# Altium PCB RFID2.PcbDoc (part 2 of 3)
Units mil, origin at the board's own origin, x right, y up, seen from the top; angles counter-clockwise.
Board outline 2824.02 x 3937.01 mil, 2 copper layers (Top Layer, Bottom Layer); 76 components, 32 nets, 236 pads, 16 vias.
Unrouted connection lines stored in the file: 34.
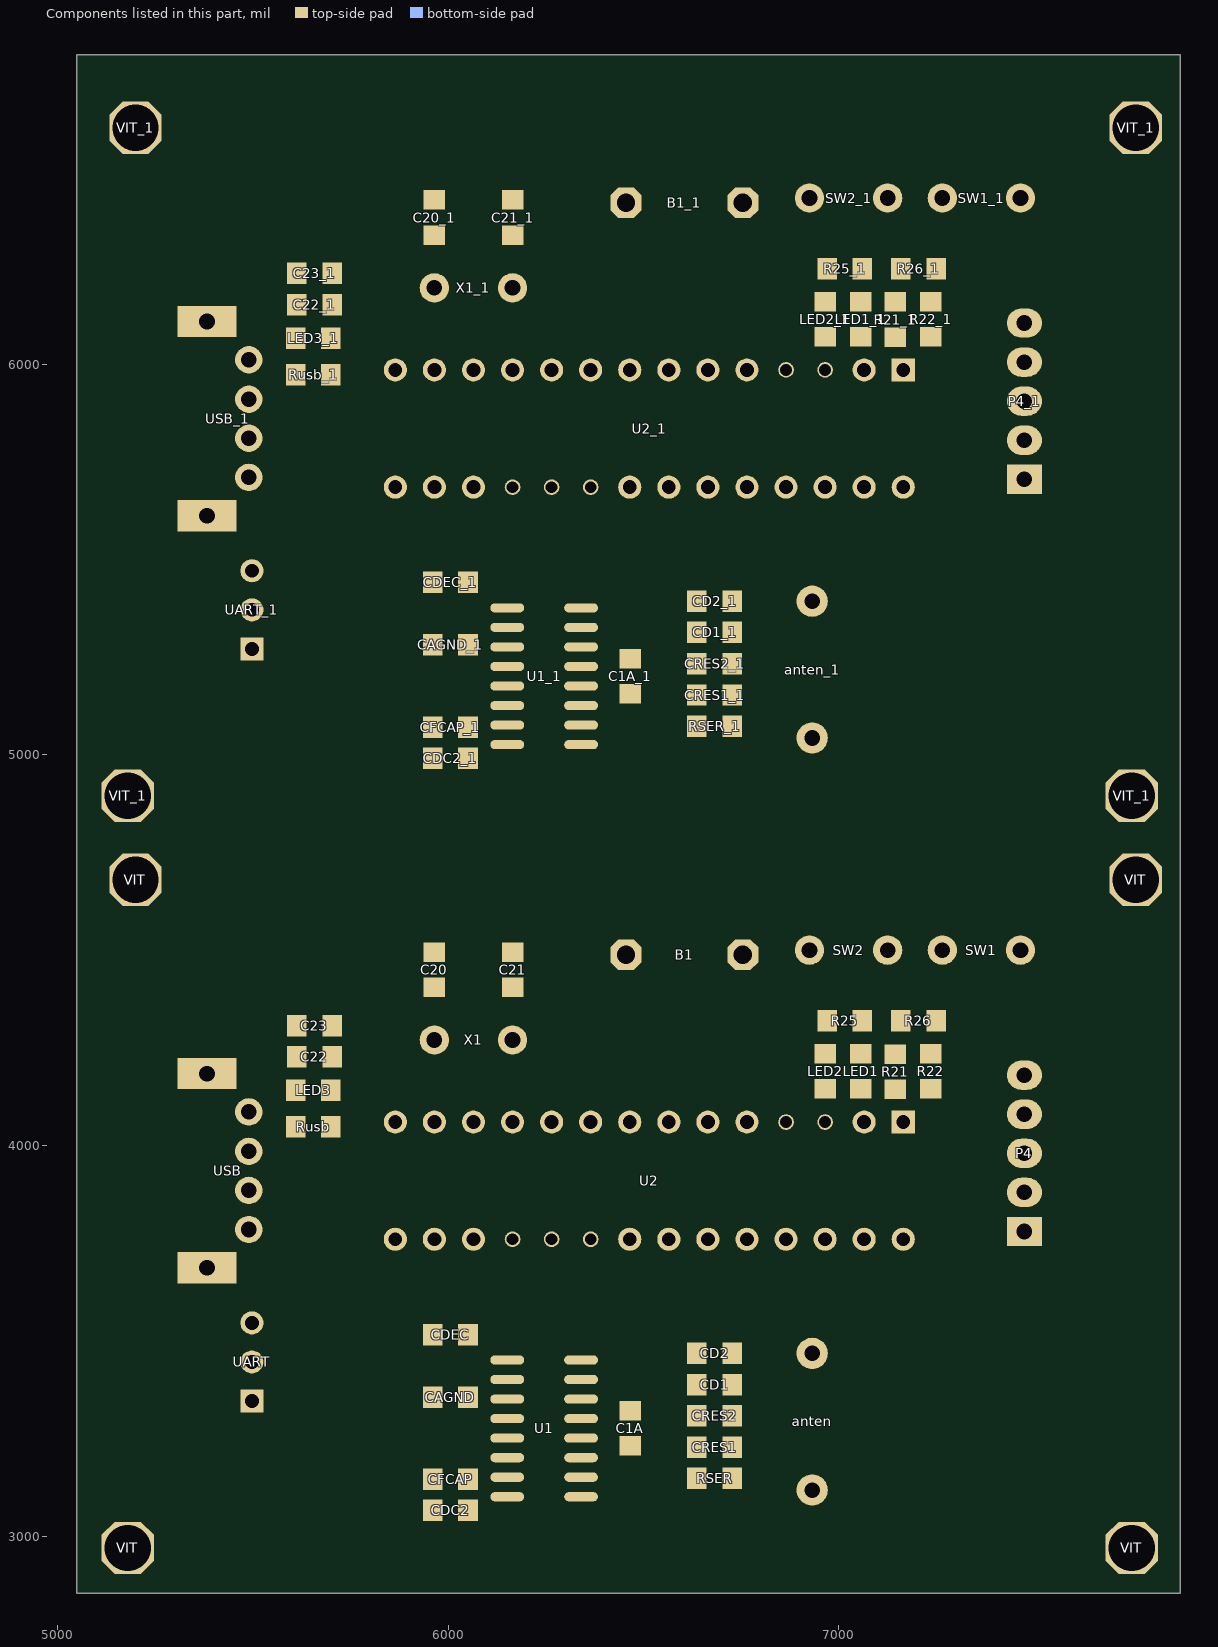
[diagram p2: the components of this part, seen from the top]

## Via types
v1: diameter 50, hole 30, Top Layer to Bottom Layer, 16 vias

## Nets (pads, with @x,y where several pads share a name; then routed paths per layer and width w, separated by ;. In a path a pad name is that pad's centre, name@x,y a point inside that pad or via, vN(x,y) a via of type N, cw(c..) or ccw(c..) an arc to the next point about the centre after c; other vN are vias at no path point) (continued)
copper on no net: (continued)
  Top Layer w1: 7369.88,5161.24 7372.88,5161.24 ; 7369.88,5162.24 7372.88,5162.24 ; 7369.88,5163.24 7372.88,5163.24 ; 7369.88,5164.24 7372.88,5164.24 ; 7369.88,5165.24 7372.88,5165.24 ; 7369.88,5166.24 7372.88,5166.24 ; 7369.88,5167.24 7372.88,5167.24 ; 7369.88,5168.24 7372.88,5168.24 ; 7369.88,5169.24 7372.88,5169.24 ; 7369.88,5170.24 7372.88,5170.24 ; 7369.88,5171.24 7372.88,5171.24 ; 7369.88,5172.24 7372.88,5172.24 ; 7369.88,5173.24 7372.88,5173.24 ; 7369.88,5174.24 7372.88,5174.24 ; 7369.88,5175.24 7372.88,5175.24 ; 7369.88,5176.24 7372.88,5176.24 ; 7369.88,5177.24 7372.88,5177.24 ; 7369.88,5178.24 7372.88,5178.24 ; 7369.88,5179.24 7372.88,5179.24 ; 7369.88,5180.24 7372.88,5180.24 ; 7369.88,5181.24 7372.88,5181.24 ; 7369.88,5182.24 7372.88,5182.24 ; 7369.88,5183.24 7372.88,5183.24 ; 7369.88,5184.24 7372.88,5184.24 ; 7369.88,5185.24 7372.88,5185.24 ; 7369.88,5186.24 7372.88,5186.24 ; 7369.88,5187.24 7372.88,5187.24 ; 7369.88,5188.24 7372.88,5188.24 ; 7369.88,5189.24 7372.88,5189.24 ; 7369.88,5190.24 7372.88,5190.24 ; 7369.88,5191.24 7372.88,5191.24 ; 7369.88,5192.24 7372.88,5192.24 ; 7369.88,5193.24 7372.88,5193.24 ; 7369.88,5194.24 7372.88,5194.24 ; 7369.88,5195.24 7372.88,5195.24 ; 7369.88,5196.24 7372.88,5196.24 ; 7369.88,5197.24 7372.88,5197.24 ; 7369.88,5198.24 7372.88,5198.24 ; 7369.88,5199.24 7372.88,5199.24 ; 7369.88,5200.24 7372.88,5200.24 ; 7369.88,5201.24 7372.88,5201.24 ; 7369.88,5202.24 7372.88,5202.24 ; 7369.88,5203.24 7372.88,5203.24 ; 7369.88,5204.24 7372.88,5204.24 ; 7369.88,5205.24 7372.88,5205.24 ; 7369.88,5206.24 7372.88,5206.24 ; 7369.88,5207.24 7372.88,5207.24 ; 7369.88,5208.24 7372.88,5208.24 ; 7369.88,5209.24 7372.88,5209.24 ; 7369.88,5210.24 7372.88,5210.24 ; 7369.88,5211.24 7372.88,5211.24 ; 7369.88,5212.24 7372.88,5212.24 ; 7369.88,5213.24 7372.88,5213.24 ; 7369.88,5214.24 7372.88,5214.24 ; 7369.88,5215.24 7372.88,5215.24 ; 7369.88,5216.24 7372.88,5216.24 ; 7369.88,5217.24 7372.88,5217.24 ; 7369.88,5218.24 7372.88,5218.24 ; 7369.88,5219.24 7372.88,5219.24 ; 7369.88,5220.24 7372.88,5220.24 ; 7369.88,5221.24 7372.88,5221.24 ; 7369.88,5222.24 7372.88,5222.24 ; 7369.88,5223.24 7372.88,5223.24 ; 7369.88,5224.24 7372.88,5224.24 ; 7369.88,5225.24 7372.88,5225.24 ; 7369.88,5226.24 7372.88,5226.24 ; 7369.88,5227.24 7372.88,5227.24 ; 7369.88,5228.24 7372.88,5228.24 ; 7369.88,5229.24 7372.88,5229.24 ; 7369.88,5230.24 7372.88,5230.24 ; 7369.88,5231.24 7372.88,5231.24 ; 7369.88,5232.24 7372.88,5232.24 ; 7369.88,5233.24 7372.88,5233.24 ; 7369.88,5234.24 7372.88,5234.24 ; 7369.88,5235.24 7372.88,5235.24 ; 7369.88,5236.24 7372.88,5236.24 ; 7369.88,5237.24 7372.88,5237.24 ; 7369.88,5238.24 7372.88,5238.24 ; 7369.88,5239.24 7372.88,5239.24 ; 7369.88,5240.24 7372.88,5240.24 ; 7369.88,5241.24 7372.88,5241.24 ; 7369.88,5242.24 7372.88,5242.24 ; 7369.88,5243.24 7372.88,5243.24 ; 7369.88,5244.24 7372.88,5244.24 ; 7369.88,5245.24 7372.88,5245.24 ; 7369.88,5246.24 7372.88,5246.24 ; 7369.88,5247.24 7372.88,5247.24 ; 7369.88,5248.24 7372.88,5248.24 ; 7369.88,5249.24 7372.88,5249.24 ; 7369.88,5250.24 7372.88,5250.24 ; 7369.88,5251.24 7372.88,5251.24 ; 7369.88,5252.24 7372.88,5252.24 ; 7369.88,5253.24 7372.88,5253.24 ; 7369.88,5254.24 7372.88,5254.24 ; 7369.88,5255.24 7372.88,5255.24 ; 7369.88,5256.24 7372.88,5256.24 ; 7369.88,5257.24 7372.88,5257.24 ; 7369.88,5258.24 7372.88,5258.24 ; 7369.88,5259.24 7372.88,5259.24 ; 7369.88,5260.24 7372.88,5260.24 ; 7369.88,5261.24 7372.88,5261.24 ; 7369.88,5262.24 7372.88,5262.24 ; 7369.88,5263.24 7372.88,5263.24 ; 7369.88,5264.24 7372.88,5264.24 ; 7369.88,5265.24 7372.88,5265.24 ; 7369.88,5266.24 7372.88,5266.24 ; 7369.88,5267.24 7372.88,5267.24 ; 7369.88,5268.24 7372.88,5268.24 ; 7369.88,5269.24 7372.88,5269.24 ; 7369.88,5270.24 7372.88,5270.24 ; 7369.88,5271.24 7372.88,5271.24 ; 7369.88,5272.24 7372.88,5272.24 ; 7369.88,5273.24 7372.88,5273.24 ; 7369.88,5274.24 7372.88,5274.24 ; 7369.88,5275.24 7372.88,5275.24 ; 7369.88,5276.24 7372.88,5276.24 ; 7369.88,5277.24 7372.88,5277.24 ; 7369.88,5278.24 7372.88,5278.24 ; 7369.88,5279.24 7372.88,5279.24 ; 7369.88,5280.24 7372.88,5280.24 ; 7369.88,5281.24 7372.88,5281.24 ; 7369.88,5282.24 7372.88,5282.24 ; 7369.88,5283.24 7372.88,5283.24 ; 7369.88,5284.24 7372.88,5284.24 ; 7369.88,5285.24 7372.88,5285.24 ; 7369.88,5286.24 7372.88,5286.24 ; 7369.88,5287.24 7372.88,5287.24 ; 7369.88,5288.24 7372.88,5288.24 ; 7369.88,5289.24 7372.88,5289.24 ; 7369.88,5290.24 7372.88,5290.24 ; 7369.88,5291.24 7372.88,5291.24 ; 7369.88,5292.24 7372.88,5292.24 ; 7369.88,5293.24 7372.88,5293.24 ; 7369.88,5294.24 7372.88,5294.24 ; 7369.88,5295.24 7372.88,5295.24 ; 7369.88,5296.24 7372.88,5296.24 ; 7369.88,5297.24 7372.88,5297.24 ; 7369.88,5298.24 7372.88,5298.24 ; 7369.88,5299.24 7372.88,5299.24 ; 7369.88,5300.24 7372.88,5300.24 ; 7369.88,5301.24 7372.88,5301.24 ; 7369.88,5302.24 7372.88,5302.24 ; 7369.88,5303.24 7372.88,5303.24 ; 7369.88,5304.24 7372.88,5304.24 ; 7369.88,5305.24 7372.88,5305.24 ; 7369.88,5306.24 7372.88,5306.24 ; 7369.88,5307.24 7373.88,5307.24 ; 7370.88,5157.24 7374.88,5157.24 ; 7370.88,5158.24 7373.88,5158.24 ; 7370.88,5159.24 7373.88,5159.24 ; 7370.88,5160.24 7373.88,5160.24 ; 7370.88,5308.24 7373.88,5308.24 ; 7370.88,5309.24 7373.88,5309.24 ; 7370.88,5310.24 7374.88,5310.24 ; 7371.88,5155.24 7374.88,5155.24 ; 7371.88,5156.24 7374.88,5156.24 ; 7371.88,5311.24 7374.88,5311.24 ; 7371.88,5312.24 7374.88,5312.24 ; 7371.88,5313.24 7375.88,5313.24 ; 7372.88,5153.24 7375.88,5153.24 ; 7372.88,5154.24 7375.88,5154.24 ; 7372.88,5314.24 7375.88,5314.24 ; 7372.88,5315.24 7376.88,5315.24 ; 7373.88,5151.24 7377.88,5151.24 ; 7373.88,5152.24 7376.88,5152.24 ; 7373.88,5316.24 7376.88,5316.24 ; 7373.88,5317.24 7377.88,5317.24 ; 7374.88,5149.24 7378.88,5149.24 ; 7374.88,5150.24 7377.88,5150.24 ; 7374.88,5318.24 7378.88,5318.24 ; 7375.88,5148.24 7379.88,5148.24 ; 7375.88,5319.24 7379.88,5319.24 ; 7375.88,5320.24 7379.88,5320.24 ; 7376.88,5146.24 7380.88,5146.24 ; 7376.88,5147.24 7380.88,5147.24 ; 7376.88,5321.24 7380.88,5321.24 ; 7377.88,5145.24 7381.88,5145.24 ; 7377.88,5322.24 7381.88,5322.24 ; 7378.88,5144.24 7383.88,5144.24 ; 7378.88,5323.24 7382.88,5323.24 ; 7379.88,3221.24 7382.88,3221.24 ; 7379.88,3222.24 7382.88,3222.24 ; 7379.88,3223.24 7382.88,3223.24 ; 7379.88,3224.24 7382.88,3224.24 ; 7379.88,3225.24 7382.88,3225.24 ; 7379.88,3226.24 7382.88,3226.24 ; 7379.88,3227.24 7382.88,3227.24 ; 7379.88,3228.24 7382.88,3228.24 ; 7379.88,3229.24 7382.88,3229.24 ; 7379.88,3230.24 7382.88,3230.24 ; 7379.88,3231.24 7382.88,3231.24 ; 7379.88,3232.24 7382.88,3232.24 ; 7379.88,3233.24 7382.88,3233.24 ; 7379.88,3234.24 7382.88,3234.24 ; 7379.88,3235.24 7382.88,3235.24 ; 7379.88,3236.24 7382.88,3236.24 ; 7379.88,3237.24 7382.88,3237.24 ; 7379.88,3238.24 7382.88,3238.24 ; 7379.88,3239.24 7382.88,3239.24 ; 7379.88,3240.24 7382.88,3240.24 ; 7379.88,3241.24 7382.88,3241.24 ; 7379.88,3242.24 7382.88,3242.24 ; 7379.88,3243.24 7382.88,3243.24 ; 7379.88,3244.24 7382.88,3244.24 ; 7379.88,3245.24 7382.88,3245.24 ; 7379.88,3246.24 7382.88,3246.24 ; 7379.88,3247.24 7382.88,3247.24 ; 7379.88,3248.24 7382.88,3248.24 ; 7379.88,3249.24 7382.88,3249.24 ; 7379.88,3250.24 7382.88,3250.24 ; 7379.88,3251.24 7382.88,3251.24 ; 7379.88,3252.24 7382.88,3252.24 ; 7379.88,3253.24 7382.88,3253.24 ; 7379.88,3254.24 7382.88,3254.24 ; 7379.88,3255.24 7382.88,3255.24 ; 7379.88,3256.24 7382.88,3256.24 ; 7379.88,3257.24 7382.88,3257.24 ; 7379.88,3258.24 7382.88,3258.24 ; 7379.88,3259.24 7382.88,3259.24 ; 7379.88,3260.24 7382.88,3260.24 ; 7379.88,3261.24 7382.88,3261.24 ; 7379.88,3262.24 7382.88,3262.24 ; 7379.88,3263.24 7382.88,3263.24 ; 7379.88,3264.24 7382.88,3264.24 ; 7379.88,3265.24 7382.88,3265.24 ; 7379.88,3266.24 7382.88,3266.24 ; 7379.88,3267.24 7382.88,3267.24 ; 7379.88,3268.24 7382.88,3268.24 ; 7379.88,3269.24 7382.88,3269.24 ; 7379.88,3270.24 7382.88,3270.24 ; 7379.88,3271.24 7382.88,3271.24 ; 7379.88,3272.24 7382.88,3272.24 ; 7379.88,3273.24 7382.88,3273.24 ; 7379.88,3274.24 7382.88,3274.24 ; 7379.88,3275.24 7382.88,3275.24 ; 7379.88,3276.24 7382.88,3276.24 ; 7379.88,3277.24 7382.88,3277.24 ; 7379.88,3278.24 7382.88,3278.24 ; 7379.88,3279.24 7382.88,3279.24 ; 7379.88,3280.24 7382.88,3280.24 ; 7379.88,3281.24 7382.88,3281.24 ; 7379.88,3282.24 7382.88,3282.24 ; 7379.88,3283.24 7382.88,3283.24 ; 7379.88,3284.24 7382.88,3284.24 ; 7379.88,3285.24 7382.88,3285.24 ; 7379.88,3286.24 7382.88,3286.24 ; 7379.88,3287.24 7382.88,3287.24 ; 7379.88,3288.24 7382.88,3288.24 ; 7379.88,3289.24 7382.88,3289.24 ; 7379.88,3290.24 7382.88,3290.24 ; 7379.88,3291.24 7382.88,3291.24 ; 7379.88,3292.24 7382.88,3292.24 ; 7379.88,3293.24 7382.88,3293.24 ; 7379.88,3294.24 7382.88,3294.24 ; 7379.88,3295.24 7382.88,3295.24 ; 7379.88,3296.24 7382.88,3296.24 ; 7379.88,3297.24 7382.88,3297.24 ; 7379.88,3298.24 7382.88,3298.24 ; 7379.88,3299.24 7382.88,3299.24 ; 7379.88,3300.24 7382.88,3300.24 ; 7379.88,3301.24 7382.88,3301.24 ; 7379.88,3302.24 7382.88,3302.24 ; 7379.88,3303.24 7382.88,3303.24 ; 7379.88,3304.24 7382.88,3304.24 ; 7379.88,3305.24 7382.88,3305.24 ; 7379.88,3306.24 7382.88,3306.24 ; 7379.88,3307.24 7382.88,3307.24 ; 7379.88,3308.24 7382.88,3308.24 ; 7379.88,3309.24 7382.88,3309.24 ; 7379.88,3310.24 7382.88,3310.24 ; 7379.88,3311.24 7382.88,3311.24 ; 7379.88,3312.24 7382.88,3312.24 ; 7379.88,3313.24 7382.88,3313.24 ; 7379.88,3314.24 7382.88,3314.24 ; 7379.88,3315.24 7382.88,3315.24 ; 7379.88,3316.24 7382.88,3316.24 ; 7379.88,3317.24 7382.88,3317.24 ; 7379.88,3318.24 7382.88,3318.24 ; 7379.88,3319.24 7382.88,3319.24 ; 7379.88,3320.24 7382.88,3320.24 ; 7379.88,3321.24 7382.88,3321.24 ; 7379.88,3322.24 7382.88,3322.24 ; 7379.88,3323.24 7382.88,3323.24 ; 7379.88,3324.24 7382.88,3324.24 ; 7379.88,3325.24 7382.88,3325.24 ; 7379.88,3326.24 7382.88,3326.24 ; 7379.88,3327.24 7382.88,3327.24 ; 7379.88,3328.24 7382.88,3328.24 ; 7379.88,3329.24 7382.88,3329.24 ; 7379.88,3330.24 7382.88,3330.24 ; 7379.88,3331.24 7382.88,3331.24 ; 7379.88,3332.24 7382.88,3332.24 ; 7379.88,3333.24 7382.88,3333.24 ; 7379.88,3334.24 7382.88,3334.24 ; 7379.88,3335.24 7382.88,3335.24 ; 7379.88,3336.24 7382.88,3336.24 ; 7379.88,3337.24 7382.88,3337.24 ; 7379.88,3338.24 7382.88,3338.24 ; 7379.88,3339.24 7382.88,3339.24 ; 7379.88,3340.24 7382.88,3340.24 ; 7379.88,3341.24 7382.88,3341.24 ; 7379.88,3342.24 7382.88,3342.24 ; 7379.88,3343.24 7382.88,3343.24 ; 7379.88,3344.24 7382.88,3344.24 ; 7379.88,3345.24 7382.88,3345.24 ; 7379.88,3346.24 7382.88,3346.24 ; 7379.88,3347.24 7382.88,3347.24 ; 7379.88,3348.24 7382.88,3348.24 ; 7379.88,3349.24 7382.88,3349.24 ; 7379.88,3350.24 7382.88,3350.24 ; 7379.88,3351.24 7382.88,3351.24 ; 7379.88,3352.24 7382.88,3352.24 ; 7379.88,3353.24 7382.88,3353.24 ; 7379.88,3354.24 7382.88,3354.24 ; 7379.88,3355.24 7382.88,3355.24 ; 7379.88,3356.24 7382.88,3356.24 ; 7379.88,3357.24 7382.88,3357.24 ; 7379.88,3358.24 7382.88,3358.24 ; 7379.88,3359.24 7382.88,3359.24 ; 7379.88,3360.24 7382.88,3360.24 ; 7379.88,3361.24 7382.88,3361.24 ; 7379.88,3362.24 7382.88,3362.24 ; 7379.88,3363.24 7382.88,3363.24 ; 7379.88,3364.24 7382.88,3364.24 ; 7379.88,3365.24 7382.88,3365.24 ; 7379.88,3366.24 7382.88,3366.24 ; 7379.88,3367.24 7383.88,3367.24 ; 7379.88,5143.24 7384.88,5143.24 ; 7379.88,5324.24 7384.88,5324.24 ; 7380.88,3217.24 7384.88,3217.24 ; 7380.88,3218.24 7383.88,3218.24 ; 7380.88,3219.24 7383.88,3219.24 ; 7380.88,3220.24 7383.88,3220.24 ; 7380.88,3368.24 7383.88,3368.24 ; 7380.88,3369.24 7383.88,3369.24 ; 7380.88,3370.24 7384.88,3370.24 ; 7380.88,5142.24 7385.88,5142.24 ; 7380.88,5325.24 7385.88,5325.24 ; 7381.88,3215.24 7384.88,3215.24 ; 7381.88,3216.24 7384.88,3216.24 ; 7381.88,3371.24 7384.88,3371.24 ; 7381.88,3372.24 7384.88,3372.24 ; 7381.88,3373.24 7385.88,3373.24 ; 7381.88,5326.24 7386.88,5326.24 ; 7382.88,3213.24 7385.88,3213.24 ; 7382.88,3214.24 7385.88,3214.24 ; 7382.88,3374.24 7385.88,3374.24 ; 7382.88,3375.24 7386.88,3375.24 ; 7382.88,5141.24 7387.88,5141.24 ; 7382.88,5327.24 7388.88,5327.24 ; 7383.88,3211.24 7387.88,3211.24 ; 7383.88,3212.24 7386.88,3212.24 ; 7383.88,3376.24 7386.88,3376.24 ; 7383.88,3377.24 7387.88,3377.24 ; 7383.88,5140.24 7388.88,5140.24 ; 7384.88,3209.24 7388.88,3209.24 ; 7384.88,3210.24 7387.88,3210.24 ; 7384.88,3378.24 7388.88,3378.24 ; 7384.88,5139.24 7391.88,5139.24 ; 7384.88,5328.24 7390.88,5328.24 ; 7385.88,3208.24 7389.88,3208.24 ; 7385.88,3379.24 7389.88,3379.24 ; 7385.88,3380.24 7389.88,3380.24 ; 7385.88,5329.24 7393.88,5329.24 ; 7386.88,3206.24 7390.88,3206.24 ; 7386.88,3207.24 7390.88,3207.24 ; 7386.88,3381.24 7390.88,3381.24 ; 7386.88,5138.24 7393.88,5138.24 ; 7386.88,5304.24 7408.88,5304.24 ; 7386.88,5305.24 7407.88,5305.24 ; 7386.88,5306.24 7406.88,5306.24 ; 7386.88,5307.24 7406.88,5307.24 ; 7386.88,5308.24 7406.88,5308.24 ; 7386.88,5309.24 7406.88,5309.24 ; 7386.88,5310.24 7405.88,5310.24 ; 7387.88,3205.24 7391.88,3205.24 ; 7387.88,3382.24 7391.88,3382.24 ; 7387.88,5302.24 7410.88,5302.24 ; 7387.88,5303.24 7409.88,5303.24 ; 7387.88,5311.24 7405.88,5311.24 ; 7387.88,5312.24 7404.88,5312.24 ; 7387.88,5330.24 7396.88,5330.24 ; 7388.88,3204.24 7393.88,3204.24 ; 7388.88,3383.24 7392.88,3383.24 ; 7388.88,5137.24 7397.88,5137.24 ; 7388.88,5300.24 7412.88,5300.24 ; 7388.88,5301.24 7411.88,5301.24 ; 7388.88,5313.24 7404.88,5313.24 ; 7389.88,3203.24 7394.88,3203.24 ; 7389.88,3384.24 7394.88,3384.24 ; 7389.88,5154.24 7392.88,5154.24 ; 7389.88,5155.24 7398.88,5155.24 ; 7389.88,5156.24 7404.88,5156.24 ; 7389.88,5157.24 7410.88,5157.24 ; 7389.88,5158.24 7411.88,5158.24 ; 7389.88,5299.24 7413.88,5299.24 ; 7389.88,5314.24 7403.88,5314.24 ; 7389.88,5331.24 7548.88,5331.24 ; 7390.88,3202.24 7395.88,3202.24 ; 7390.88,3385.24 7395.88,3385.24 ; 7390.88,5136.24 7548.88,5136.24 ; 7390.88,5159.24 7412.88,5159.24 ; 7390.88,5160.24 7413.88,5160.24 ; 7390.88,5161.24 7414.88,5161.24 ; 7390.88,5162.24 7415.88,5162.24 ; 7390.88,5163.24 7416.88,5163.24 ; 7390.88,5164.24 7417.88,5164.24 ; 7390.88,5315.24 7401.88,5315.24 ; 7391.88,3386.24 7396.88,3386.24 ; 7391.88,5165.24 7418.88,5165.24 ; 7391.88,5166.24 7419.88,5166.24 ; 7391.88,5167.24 7420.88,5167.24 ; 7391.88,5168.24 7421.88,5168.24 ; 7391.88,5169.24 7422.88,5169.24 ; 7391.88,5170.24 7423.88,5170.24 ; 7391.88,5298.24 7414.88,5298.24 ; 7392.88,3201.24 7397.88,3201.24 ; 7392.88,3387.24 7398.88,3387.24 ; 7392.88,5171.24 7424.88,5171.24 ; 7392.88,5172.24 7425.88,5172.24 ; 7392.88,5173.24 7426.88,5173.24 ; 7392.88,5174.24 7427.88,5174.24 ; 7392.88,5316.24 7399.88,5316.24 ; 7392.88,5332.24 7546.88,5332.24 ; 7393.88,3200.24 7398.88,3200.24 ; 7393.88,5135.24 7545.88,5135.24 ; 7393.88,5175.24 7428.88,5175.24 ; 7393.88,5297.24 7415.88,5297.24 ; 7394.88,3199.24 7401.88,3199.24 ; 7394.88,3388.24 7400.88,3388.24 ; 7394.88,5176.24 7429.88,5176.24 ; 7395.88,3389.24 7403.88,3389.24 ; 7395.88,5177.24 7430.88,5177.24 ; 7395.88,5333.24 7542.88,5333.24 ; 7396.88,3198.24 7403.88,3198.24 ; 7396.88,3364.24 7418.88,3364.24 ; 7396.88,3365.24 7417.88,3365.24 ; 7396.88,3366.24 7416.88,3366.24 ; 7396.88,3367.24 7416.88,3367.24 ; 7396.88,3368.24 7416.88,3368.24 ; 7396.88,3369.24 7416.88,3369.24 ; 7396.88,3370.24 7415.88,3370.24 ; 7396.88,5134.24 7541.88,5134.24 ; 7396.88,5178.24 7431.88,5178.24 ; 7396.88,5248.24 7398.88,5248.24 ; 7397.88,3362.24 7420.88,3362.24 ; 7397.88,3363.24 7419.88,3363.24 ; 7397.88,3371.24 7415.88,3371.24 ; 7397.88,3372.24 7414.88,3372.24 ; 7397.88,3390.24 7406.88,3390.24 ; 7397.88,5179.24 7432.88,5179.24 ; 7397.88,5249.24 7401.88,5249.24 ; 7397.88,5296.24 7416.88,5296.24 ; 7398.88,3197.24 7407.88,3197.24 ; 7398.88,3360.24 7422.88,3360.24 ; 7398.88,3361.24 7421.88,3361.24 ; 7398.88,3373.24 7414.88,3373.24 ; 7398.88,5180.24 7433.88,5180.24 ; 7398.88,5250.24 7404.88,5250.24 ; 7398.88,5295.24 7417.88,5295.24 ; 7399.88,3214.24 7402.88,3214.24 ; 7399.88,3215.24 7408.88,3215.24 ; 7399.88,3216.24 7414.88,3216.24 ; 7399.88,3217.24 7420.88,3217.24 ; 7399.88,3218.24 7421.88,3218.24 ; 7399.88,3359.24 7423.88,3359.24 ; 7399.88,3374.24 7413.88,3374.24 ; 7399.88,3391.24 7558.88,3391.24 ; 7399.88,5181.24 7434.88,5181.24 ; 7399.88,5251.24 7407.88,5251.24 ; 7399.88,5294.24 7418.88,5294.24 ; 7400.88,3196.24 7558.88,3196.24 ; 7400.88,3219.24 7422.88,3219.24 ; 7400.88,3220.24 7423.88,3220.24 ; 7400.88,3221.24 7424.88,3221.24 ; 7400.88,3222.24 7425.88,3222.24 ; 7400.88,3223.24 7426.88,3223.24 ; 7400.88,3224.24 7427.88,3224.24 ; 7400.88,3375.24 7411.88,3375.24 ; 7400.88,5182.24 7435.88,5182.24 ; 7400.88,5252.24 7410.88,5252.24 ; 7400.88,5293.24 7419.88,5293.24 ; 7401.88,3225.24 7428.88,3225.24 ; 7401.88,3226.24 7429.88,3226.24 ; 7401.88,3227.24 7430.88,3227.24 ; 7401.88,3228.24 7431.88,3228.24 ; 7401.88,3229.24 7432.88,3229.24 ; 7401.88,3230.24 7433.88,3230.24 ; 7401.88,3358.24 7424.88,3358.24 ; 7401.88,5183.24 7436.88,5183.24 ; 7401.88,5253.24 7412.88,5253.24 ; 7401.88,5292.24 7420.88,5292.24 ; 7402.88,3231.24 7434.88,3231.24 ; 7402.88,3232.24 7435.88,3232.24 ; 7402.88,3233.24 7436.88,3233.24 ; 7402.88,3234.24 7437.88,3234.24 ; 7402.88,3376.24 7409.88,3376.24 ; 7402.88,3392.24 7556.88,3392.24 ; 7402.88,5184.24 7437.88,5184.24 ; 7402.88,5254.24 7415.88,5254.24 ; 7402.88,5291.24 7421.88,5291.24 ; 7403.88,3195.24 7555.88,3195.24 ; 7403.88,3235.24 7438.88,3235.24 ; 7403.88,3357.24 7425.88,3357.24 ; 7403.88,5185.24 7438.88,5185.24 ; 7403.88,5255.24 7418.88,5255.24 ; 7403.88,5290.24 7422.88,5290.24 ; 7404.88,3236.24 7439.88,3236.24 ; 7404.88,5186.24 7439.88,5186.24 ; 7404.88,5256.24 7419.88,5256.24 ; 7404.88,5289.24 7423.88,5289.24 ; 7405.88,3237.24 7440.88,3237.24 ; 7405.88,3393.24 7552.88,3393.24 ; 7405.88,5187.24 7440.88,5187.24 ; 7405.88,5257.24 7420.88,5257.24 ; 7405.88,5288.24 7424.88,5288.24 ; 7406.88,3194.24 7551.88,3194.24 ; 7406.88,3238.24 7441.88,3238.24 ; 7406.88,3308.24 7408.88,3308.24 ; 7406.88,5188.24 7441.88,5188.24 ; 7406.88,5258.24 7421.88,5258.24 ; 7406.88,5287.24 7425.88,5287.24 ; 7407.88,3239.24 7442.88,3239.24 ; 7407.88,3309.24 7411.88,3309.24 ; 7407.88,3356.24 7426.88,3356.24 ; 7407.88,5189.24 7442.88,5189.24 ; 7407.88,5259.24 7422.88,5259.24 ; 7407.88,5286.24 7426.88,5286.24 ; 7408.88,3240.24 7443.88,3240.24 ; 7408.88,3310.24 7414.88,3310.24 ; 7408.88,3355.24 7427.88,3355.24 ; 7408.88,5190.24 7443.88,5190.24 ; 7408.88,5260.24 7423.88,5260.24 ; 7408.88,5285.24 7427.88,5285.24 ; 7409.88,3241.24 7444.88,3241.24 ; 7409.88,3311.24 7417.88,3311.24 ; 7409.88,3354.24 7428.88,3354.24 ; 7409.88,5191.24 7444.88,5191.24 ; 7409.88,5261.24 7459.88,5261.24 ; 7409.88,5284.24 7428.88,5284.24 ; 7410.88,3242.24 7445.88,3242.24 ; 7410.88,3312.24 7420.88,3312.24 ; 7410.88,3353.24 7429.88,3353.24 ; 7410.88,5192.24 7445.88,5192.24 ; 7410.88,5262.24 7458.88,5262.24 ; 7410.88,5283.24 7429.88,5283.24 ; 7411.88,3243.24 7446.88,3243.24 ; 7411.88,3313.24 7422.88,3313.24 ; 7411.88,3352.24 7430.88,3352.24 ; 7411.88,5193.24 7446.88,5193.24 ; 7411.88,5263.24 7457.88,5263.24 ; 7411.88,5282.24 7445.88,5282.24 ; 7412.88,3244.24 7447.88,3244.24 ; 7412.88,3314.24 7425.88,3314.24 ; 7412.88,3351.24 7431.88,3351.24 ; 7412.88,5194.24 7447.88,5194.24 ; 7412.88,5264.24 7456.88,5264.24 ; 7412.88,5281.24 7444.88,5281.24 ; 7413.88,3245.24 7448.88,3245.24 ; 7413.88,3315.24 7428.88,3315.24 ; 7413.88,3350.24 7432.88,3350.24 ; 7413.88,5195.24 7448.88,5195.24 ; 7413.88,5265.24 7455.88,5265.24 ; 7413.88,5280.24 7443.88,5280.24 ; 7414.88,3246.24 7449.88,3246.24 ; 7414.88,3316.24 7429.88,3316.24 ; 7414.88,3349.24 7433.88,3349.24 ; 7414.88,5196.24 7449.88,5196.24 ; 7414.88,5266.24 7454.88,5266.24 ; 7414.88,5279.24 7442.88,5279.24 ; 7415.88,3247.24 7450.88,3247.24 ; 7415.88,3317.24 7430.88,3317.24 ; 7415.88,3348.24 7434.88,3348.24 ; 7415.88,5197.24 7450.88,5197.24 ; 7415.88,5267.24 7453.88,5267.24 ; 7415.88,5278.24 7442.88,5278.24 ; 7416.88,3248.24 7451.88,3248.24 ; 7416.88,3318.24 7431.88,3318.24 ; 7416.88,3347.24 7435.88,3347.24 ; 7416.88,5198.24 7451.88,5198.24 ; 7416.88,5268.24 7452.88,5268.24 ; 7416.88,5277.24 7443.88,5277.24 ; 7417.88,3249.24 7452.88,3249.24 ; 7417.88,3319.24 7432.88,3319.24 ; 7417.88,3346.24 7436.88,3346.24 ; 7417.88,5199.24 7452.88,5199.24 ; 7417.88,5269.24 7451.88,5269.24 ; 7417.88,5276.24 7444.88,5276.24 ; 7418.88,3250.24 7453.88,3250.24 ; 7418.88,3320.24 7433.88,3320.24 ; 7418.88,3345.24 7437.88,3345.24 ; 7418.88,5200.24 7453.88,5200.24 ; 7418.88,5270.24 7450.88,5270.24 ; 7418.88,5275.24 7445.88,5275.24 ; 7419.88,3251.24 7454.88,3251.24 ; 7419.88,3321.24 7469.88,3321.24 ; 7419.88,3344.24 7438.88,3344.24 ; 7419.88,5201.24 7454.88,5201.24 ; 7419.88,5271.24 7449.88,5271.24 ; 7419.88,5274.24 7446.88,5274.24 ; 7420.88,3252.24 7455.88,3252.24 ; 7420.88,3322.24 7468.88,3322.24 ; 7420.88,3343.24 7439.88,3343.24 ; 7420.88,5202.24 7455.88,5202.24 ; 7420.88,5272.24 7448.88,5272.24 ; 7420.88,5273.24 7447.88,5273.24 ; 7421.88,3253.24 7456.88,3253.24 ; 7421.88,3323.24 7467.88,3323.24 ; 7421.88,3342.24 7455.88,3342.24 ; 7421.88,5203.24 7456.88,5203.24 ; 7422.88,3254.24 7457.88,3254.24 ; 7422.88,3324.24 7466.88,3324.24 ; 7422.88,3341.24 7454.88,3341.24 ; 7422.88,5204.24 7457.88,5204.24 ; 7423.88,3255.24 7458.88,3255.24 ; 7423.88,3325.24 7465.88,3325.24 ; 7423.88,3340.24 7453.88,3340.24 ; 7423.88,5205.24 7458.88,5205.24 ; 7424.88,3256.24 7459.88,3256.24 ; 7424.88,3326.24 7464.88,3326.24 ; 7424.88,3339.24 7452.88,3339.24 ; 7424.88,5206.24 7459.88,5206.24 ; 7425.88,3257.24 7460.88,3257.24 ; 7425.88,3327.24 7463.88,3327.24 ; 7425.88,3338.24 7452.88,3338.24 ; 7425.88,5207.24 7460.88,5207.24 ; 7425.88,5260.24 7460.88,5260.24 ; 7426.88,3258.24 7461.88,3258.24 ; 7426.88,3328.24 7462.88,3328.24 ; 7426.88,3337.24 7453.88,3337.24 ; 7426.88,5208.24 7461.88,5208.24 ; 7426.88,5259.24 7461.88,5259.24 ; 7427.88,3259.24 7462.88,3259.24 ; 7427.88,3329.24 7461.88,3329.24 ; 7427.88,3336.24 7454.88,3336.24 ; 7427.88,5209.24 7462.88,5209.24 ; 7427.88,5258.24 7462.88,5258.24 ; 7428.88,3260.24 7463.88,3260.24 ; 7428.88,3330.24 7460.88,3330.24 ; 7428.88,3335.24 7455.88,3335.24 ; 7428.88,5210.24 7463.88,5210.24 ; 7428.88,5257.24 7463.88,5257.24 ; 7429.88,3261.24 7464.88,3261.24 ; 7429.88,3331.24 7459.88,3331.24 ; 7429.88,3334.24 7456.88,3334.24 ; 7429.88,5211.24 7464.88,5211.24 ; 7429.88,5256.24 7464.88,5256.24 ; 7430.88,3262.24 7465.88,3262.24 ; 7430.88,3332.24 7458.88,3332.24 ; 7430.88,3333.24 7457.88,3333.24 ; 7430.88,5212.24 7465.88,5212.24 ; 7430.88,5255.24 7465.88,5255.24 ; 7431.88,3263.24 7466.88,3263.24 ; 7431.88,5213.24 7466.88,5213.24 ; 7431.88,5254.24 7466.88,5254.24 ; 7431.88,5283.24 7446.88,5283.24 ; 7432.88,3264.24 7467.88,3264.24 ; 7432.88,5214.24 7467.88,5214.24 ; 7432.88,5253.24 7467.88,5253.24 ; 7432.88,5284.24 7447.88,5284.24 ; 7433.88,3265.24 7468.88,3265.24 ; 7433.88,5215.24 7468.88,5215.24 ; 7433.88,5252.24 7468.88,5252.24 ; 7433.88,5285.24 7448.88,5285.24 ; 7434.88,3266.24 7469.88,3266.24 ; 7434.88,5216.24 7504.88,5216.24 ; 7434.88,5251.24 7504.88,5251.24 ; 7434.88,5286.24 7448.88,5286.24 ; 7435.88,3267.24 7470.88,3267.24 ; 7435.88,3320.24 7470.88,3320.24 ; 7435.88,5217.24 7503.88,5217.24 ; 7435.88,5250.24 7503.88,5250.24 ; 7435.88,5287.24 7448.88,5287.24 ; 7436.88,3268.24 7471.88,3268.24 ; 7436.88,3319.24 7471.88,3319.24 ; 7436.88,5218.24 7502.88,5218.24 ; 7436.88,5249.24 7502.88,5249.24 ; 7436.88,5288.24 7449.88,5288.24 ; 7437.88,3269.24 7472.88,3269.24 ; 7437.88,3318.24 7472.88,3318.24 ; 7437.88,5219.24 7501.88,5219.24 ; 7437.88,5248.24 7501.88,5248.24 ; 7437.88,5289.24 7449.88,5289.24 ; 7438.88,3270.24 7473.88,3270.24 ; 7438.88,3317.24 7473.88,3317.24 ; 7438.88,5220.24 7500.88,5220.24 ; 7438.88,5247.24 7500.88,5247.24 ; 7438.88,5290.24 7449.88,5290.24 ; 7439.88,3271.24 7474.88,3271.24 ; 7439.88,3316.24 7474.88,3316.24 ; 7439.88,5221.24 7499.88,5221.24 ; 7439.88,5246.24 7499.88,5246.24 ; 7439.88,5291.24 7450.88,5291.24 ; 7440.88,3272.24 7475.88,3272.24 ; 7440.88,3315.24 7475.88,3315.24 ; 7440.88,5222.24 7498.88,5222.24 ; 7440.88,5245.24 7498.88,5245.24 ; 7440.88,5292.24 7450.88,5292.24 ; 7441.88,3273.24 7476.88,3273.24 ; 7441.88,3314.24 7476.88,3314.24 ; 7441.88,3343.24 7456.88,3343.24 ; 7441.88,5223.24 7497.88,5223.24 ; 7441.88,5244.24 7497.88,5244.24 ; 7441.88,5293.24 7451.88,5293.24 ; 7442.88,3274.24 7477.88,3274.24 ; 7442.88,3313.24 7477.88,3313.24 ; 7442.88,3344.24 7457.88,3344.24 ; 7442.88,5224.24 7496.88,5224.24 ; 7442.88,5243.24 7496.88,5243.24 ; 7442.88,5294.24 7451.88,5294.24 ; 7443.88,3275.24 7478.88,3275.24 ; 7443.88,3312.24 7478.88,3312.24 ; 7443.88,3345.24 7458.88,3345.24 ; 7443.88,5225.24 7495.88,5225.24 ; 7443.88,5242.24 7495.88,5242.24 ; 7443.88,5295.24 7451.88,5295.24 ; 7444.88,3276.24 7514.88,3276.24 ; 7444.88,3311.24 7514.88,3311.24 ; 7444.88,3346.24 7458.88,3346.24 ; 7444.88,5226.24 7494.88,5226.24 ; 7444.88,5241.24 7494.88,5241.24 ; 7444.88,5296.24 7452.88,5296.24 ; 7445.88,3277.24 7513.88,3277.24 ; 7445.88,3310.24 7513.88,3310.24 ; 7445.88,3347.24 7458.88,3347.24 ; 7445.88,5227.24 7493.88,5227.24 ; 7445.88,5240.24 7493.88,5240.24 ; 7445.88,5297.24 7452.88,5297.24 ; 7446.88,3278.24 7512.88,3278.24 ; 7446.88,3309.24 7512.88,3309.24 ; 7446.88,3348.24 7459.88,3348.24 ; 7446.88,5228.24 7492.88,5228.24 ; 7446.88,5239.24 7492.88,5239.24 ; 7446.88,5298.24 7452.88,5298.24 ; 7447.88,3279.24 7511.88,3279.24 ; 7447.88,3308.24 7511.88,3308.24 ; 7447.88,3349.24 7459.88,3349.24 ; 7447.88,5229.24 7491.88,5229.24 ; 7447.88,5238.24 7491.88,5238.24 ; 7447.88,5299.24 7453.88,5299.24 ; 7448.88,3280.24 7510.88,3280.24 ; 7448.88,3307.24 7510.88,3307.24 ; 7448.88,3350.24 7459.88,3350.24 ; 7448.88,5230.24 7490.88,5230.24 ; 7448.88,5237.24 7490.88,5237.24 ; 7448.88,5300.24 7453.88,5300.24 ; 7449.88,3281.24 7509.88,3281.24 ; 7449.88,3306.24 7509.88,3306.24 ; 7449.88,3351.24 7460.88,3351.24 ; 7449.88,5231.24 7489.88,5231.24 ; 7449.88,5236.24 7489.88,5236.24 ; 7449.88,5301.24 7453.88,5301.24 ; 7450.88,3282.24 7508.88,3282.24 ; 7450.88,3305.24 7508.88,3305.24 ; 7450.88,3352.24 7460.88,3352.24 ; 7450.88,5232.24 7488.88,5232.24 ; 7450.88,5235.24 7488.88,5235.24 ; 7450.88,5302.24 7454.88,5302.24 ; 7451.88,3283.24 7507.88,3283.24 ; 7451.88,3304.24 7507.88,3304.24 ; 7451.88,3353.24 7461.88,3353.24 ; 7451.88,5233.24 7487.88,5233.24 ; 7451.88,5234.24 7487.88,5234.24 ; 7451.88,5303.24 7454.88,5303.24 ; 7452.88,3284.24 7506.88,3284.24 ; 7452.88,3303.24 7506.88,3303.24 ; 7452.88,3354.24 7461.88,3354.24 ; 7452.88,5304.24 7454.88,5304.24 ; 7453.88,3285.24 7505.88,3285.24 ; 7453.88,3302.24 7505.88,3302.24 ; 7453.88,3355.24 7461.88,3355.24 ; 7453.88,5305.24 7455.88,5305.24 ; 7454.88,3286.24 7504.88,3286.24 ; 7454.88,3301.24 7504.88,3301.24 ; 7454.88,3356.24 7462.88,3356.24 ; 7454.88,5306.24 7455.88,5306.24 ; 7455.88,3287.24 7503.88,3287.24 ; 7455.88,3300.24 7503.88,3300.24 ; 7455.88,3357.24 7462.88,3357.24 ; 7456.88,3288.24 7502.88,3288.24 ; 7456.88,3299.24 7502.88,3299.24 ; 7456.88,3358.24 7462.88,3358.24 ; 7457.88,3289.24 7501.88,3289.24 ; 7457.88,3298.24 7501.88,3298.24 ; 7457.88,3359.24 7463.88,3359.24 ; 7458.88,3290.24 7500.88,3290.24 ; 7458.88,3297.24 7500.88,3297.24 ; 7458.88,3360.24 7463.88,3360.24 ; 7459.88,3291.24 7499.88,3291.24 ; 7459.88,3296.24 7499.88,3296.24 ; 7459.88,3361.24 7463.88,3361.24 ; 7460.88,3292.24 7498.88,3292.24 ; 7460.88,3295.24 7498.88,3295.24 ; 7460.88,3362.24 7464.88,3362.24 ; 7461.88,3293.24 7497.88,3293.24 ; 7461.88,3294.24 7497.88,3294.24 ; 7461.88,3363.24 7464.88,3363.24 ; 7462.88,3364.24 7464.88,3364.24 ; 7463.88,3365.24 7465.88,3365.24 ; 7464.88,3366.24 7465.88,3366.24 ; 7470.88,5215.24 7505.88,5215.24 ; 7470.88,5252.24 7505.88,5252.24 ; 7471.88,5214.24 7506.88,5214.24 ; 7471.88,5253.24 7506.88,5253.24 ; 7472.88,5213.24 7507.88,5213.24 ; 7472.88,5254.24 7507.88,5254.24 ; 7473.88,5212.24 7508.88,5212.24 ; 7473.88,5255.24 7508.88,5255.24 ; 7474.88,5211.24 7509.88,5211.24 ; 7474.88,5256.24 7509.88,5256.24 ; 7475.88,5210.24 7510.88,5210.24 ; 7475.88,5257.24 7510.88,5257.24 ; 7476.88,5209.24 7511.88,5209.24 ; 7476.88,5258.24 7511.88,5258.24 ; 7477.88,5208.24 7512.88,5208.24 ; 7477.88,5259.24 7512.88,5259.24 ; 7478.88,5207.24 7513.88,5207.24 ; 7478.88,5260.24 7513.88,5260.24 ; 7479.88,5206.24 7514.88,5206.24 ; 7479.88,5261.24 7529.88,5261.24 ; 7480.88,3275.24 7515.88,3275.24 ; 7480.88,3312.24 7515.88,3312.24 ; 7480.88,5205.24 7515.88,5205.24 ; 7480.88,5262.24 7528.88,5262.24 ; 7481.88,3274.24 7516.88,3274.24 ; 7481.88,3313.24 7516.88,3313.24 ; 7481.88,5204.24 7516.88,5204.24 ; 7481.88,5263.24 7527.88,5263.24 ; 7482.88,3273.24 7517.88,3273.24 ; 7482.88,3314.24 7517.88,3314.24 ; 7482.88,5203.24 7517.88,5203.24 ; 7482.88,5264.24 7526.88,5264.24 ; 7483.88,3272.24 7518.88,3272.24 ; 7483.88,3315.24 7518.88,3315.24 ; 7483.88,5202.24 7518.88,5202.24 ; 7483.88,5265.24 7525.88,5265.24 ; 7483.88,5304.24 7486.88,5304.24 ; 7483.88,5305.24 7485.88,5305.24 ; 7483.88,5306.24 7484.88,5306.24 ; 7484.88,3271.24 7519.88,3271.24 ; 7484.88,3316.24 7519.88,3316.24 ; 7484.88,5201.24 7519.88,5201.24 ; 7484.88,5266.24 7524.88,5266.24 ; 7484.88,5302.24 7488.88,5302.24 ; 7484.88,5303.24 7487.88,5303.24 ; 7485.88,3270.24 7520.88,3270.24 ; 7485.88,3317.24 7520.88,3317.24 ; 7485.88,5200.24 7520.88,5200.24 ; 7485.88,5267.24 7523.88,5267.24 ; 7485.88,5299.24 7491.88,5299.24 ; 7485.88,5300.24 7490.88,5300.24 ; 7485.88,5301.24 7489.88,5301.24 ; 7486.88,3269.24 7521.88,3269.24 ; 7486.88,3318.24 7521.88,3318.24 ; 7486.88,5199.24 7521.88,5199.24 ; 7486.88,5268.24 7522.88,5268.24 ; 7486.88,5296.24 7494.88,5296.24 ; 7486.88,5297.24 7493.88,5297.24 ; 7486.88,5298.24 7492.88,5298.24 ; 7487.88,3268.24 7522.88,3268.24 ; 7487.88,3319.24 7522.88,3319.24 ; 7487.88,5198.24 7522.88,5198.24 ; 7487.88,5269.24 7521.88,5269.24 ; 7487.88,5293.24 7497.88,5293.24 ; 7487.88,5294.24 7496.88,5294.24 ; 7487.88,5295.24 7495.88,5295.24 ; 7488.88,3267.24 7523.88,3267.24 ; 7488.88,3320.24 7523.88,3320.24 ; 7488.88,5197.24 7523.88,5197.24 ; 7488.88,5270.24 7520.88,5270.24 ; 7488.88,5290.24 7500.88,5290.24 ; 7488.88,5291.24 7499.88,5291.24 ; 7488.88,5292.24 7498.88,5292.24 ; 7489.88,3266.24 7524.88,3266.24 ; 7489.88,3321.24 7539.88,3321.24 ; 7489.88,5196.24 7524.88,5196.24 ; 7489.88,5271.24 7519.88,5271.24 ; 7489.88,5287.24 7503.88,5287.24 ; 7489.88,5288.24 7502.88,5288.24 ; 7489.88,5289.24 7501.88,5289.24 ; 7490.88,3265.24 7525.88,3265.24 ; 7490.88,3322.24 7538.88,3322.24 ; 7490.88,5195.24 7525.88,5195.24 ; 7490.88,5272.24 7518.88,5272.24 ; 7490.88,5284.24 7506.88,5284.24 ; 7490.88,5285.24 7505.88,5285.24 ; 7490.88,5286.24 7504.88,5286.24 ; 7491.88,3264.24 7526.88,3264.24 ; 7491.88,3323.24 7537.88,3323.24 ; 7491.88,5194.24 7526.88,5194.24 ; 7491.88,5273.24 7518.88,5273.24 ; 7491.88,5283.24 7507.88,5283.24 ; 7492.88,3263.24 7527.88,3263.24 ; 7492.88,3324.24 7536.88,3324.24 ; 7492.88,5193.24 7527.88,5193.24 ; 7492.88,5274.24 7519.88,5274.24 ; 7492.88,5282.24 7527.88,5282.24 ; 7493.88,3262.24 7528.88,3262.24 ; 7493.88,3325.24 7535.88,3325.24 ; 7493.88,3364.24 7496.88,3364.24 ; 7493.88,3365.24 7495.88,3365.24 ; 7493.88,3366.24 7494.88,3366.24 ; 7493.88,5192.24 7528.88,5192.24 ; 7493.88,5275.24 7520.88,5275.24 ; 7493.88,5281.24 7526.88,5281.24 ; 7494.88,3261.24 7529.88,3261.24 ; 7494.88,3326.24 7534.88,3326.24 ; 7494.88,3362.24 7498.88,3362.24 ; 7494.88,3363.24 7497.88,3363.24 ; 7494.88,5191.24 7529.88,5191.24 ; 7494.88,5276.24 7521.88,5276.24 ; 7494.88,5280.24 7525.88,5280.24 ; 7495.88,3260.24 7530.88,3260.24 ; 7495.88,3327.24 7533.88,3327.24 ; 7495.88,3359.24 7501.88,3359.24 ; 7495.88,3360.24 7500.88,3360.24 ; 7495.88,3361.24 7499.88,3361.24 ; 7495.88,5190.24 7530.88,5190.24 ; 7495.88,5277.24 7522.88,5277.24 ; 7495.88,5279.24 7524.88,5279.24 ; 7496.88,3259.24 7531.88,3259.24 ; 7496.88,3328.24 7532.88,3328.24 ; 7496.88,3356.24 7504.88,3356.24 ; 7496.88,3357.24 7503.88,3357.24 ; 7496.88,3358.24 7502.88,3358.24 ; 7496.88,5189.24 7531.88,5189.24 ; 7496.88,5278.24 7523.88,5278.24 ; 7497.88,3258.24 7532.88,3258.24 ; 7497.88,3329.24 7531.88,3329.24 ; 7497.88,3353.24 7507.88,3353.24 ; 7497.88,3354.24 7506.88,3354.24 ; 7497.88,3355.24 7505.88,3355.24 ; 7497.88,5188.24 7532.88,5188.24 ; 7498.88,3257.24 7533.88,3257.24 ; 7498.88,3330.24 7530.88,3330.24 ; 7498.88,3350.24 7510.88,3350.24 ; 7498.88,3351.24 7509.88,3351.24 ; 7498.88,3352.24 7508.88,3352.24 ; 7498.88,5187.24 7533.88,5187.24 ; 7499.88,3256.24 7534.88,3256.24 ; 7499.88,3331.24 7529.88,3331.24 ; 7499.88,3347.24 7513.88,3347.24 ; 7499.88,3348.24 7512.88,3348.24 ; 7499.88,3349.24 7511.88,3349.24 ; 7499.88,5186.24 7534.88,5186.24 ; 7500.88,3255.24 7535.88,3255.24 ; 7500.88,3332.24 7528.88,3332.24 ; 7500.88,3344.24 7516.88,3344.24 ; 7500.88,3345.24 7515.88,3345.24 ; 7500.88,3346.24 7514.88,3346.24 ; 7500.88,5185.24 7535.88,5185.24 ; 7501.88,3254.24 7536.88,3254.24 ; 7501.88,3333.24 7528.88,3333.24 ; 7501.88,3343.24 7517.88,3343.24 ; 7501.88,5184.24 7536.88,5184.24 ; 7502.88,3253.24 7537.88,3253.24 ; 7502.88,3334.24 7529.88,3334.24 ; 7502.88,3342.24 7537.88,3342.24 ; 7502.88,5183.24 7537.88,5183.24 ; 7503.88,3252.24 7538.88,3252.24 ; 7503.88,3335.24 7530.88,3335.24 ; 7503.88,3341.24 7536.88,3341.24 ; 7503.88,5182.24 7538.88,5182.24 ; 7504.88,3251.24 7539.88,3251.24 ; 7504.88,3336.24 7531.88,3336.24 ; 7504.88,3340.24 7535.88,3340.24 ; 7504.88,5181.24 7539.88,5181.24 ; 7505.88,3250.24 7540.88,3250.24 ; 7505.88,3337.24 7532.88,3337.24 ; 7505.88,3339.24 7534.88,3339.24 ; 7505.88,5180.24 7540.88,5180.24 ; 7506.88,3249.24 7541.88,3249.24 ; 7506.88,3338.24 7533.88,3338.24 ; 7506.88,5179.24 7541.88,5179.24 ; 7507.88,3248.24 7542.88,3248.24 ; 7507.88,5178.24 7542.88,5178.24 ; 7508.88,3247.24 7543.88,3247.24 ; 7508.88,5177.24 7543.88,5177.24 ; 7509.88,3246.24 7544.88,3246.24 ; 7509.88,5176.24 7544.88,5176.24 ; 7509.88,5283.24 7528.88,5283.24 ; 7510.88,3245.24 7545.88,3245.24 ; 7510.88,5175.24 7545.88,5175.24 ; 7510.88,5284.24 7529.88,5284.24 ; 7511.88,3244.24 7546.88,3244.24 ; 7511.88,5174.24 7546.88,5174.24 ; 7511.88,5285.24 7530.88,5285.24 ; 7512.88,3243.24 7547.88,3243.24 ; 7512.88,5173.24 7546.88,5173.24 ; 7512.88,5286.24 7531.88,5286.24 ; 7513.88,3242.24 7548.88,3242.24 ; 7513.88,5172.24 7546.88,5172.24 ; 7513.88,5287.24 7532.88,5287.24 ; 7514.88,3241.24 7549.88,3241.24 ; 7514.88,5171.24 7546.88,5171.24 ; 7514.88,5260.24 7530.88,5260.24 ; 7514.88,5288.24 7533.88,5288.24 ; 7515.88,3240.24 7550.88,3240.24 ; 7515.88,5170.24 7546.88,5170.24 ; 7515.88,5259.24 7531.88,5259.24 ; 7515.88,5289.24 7534.88,5289.24 ; 7516.88,3239.24 7551.88,3239.24 ; 7516.88,5169.24 7547.88,5169.24 ; 7516.88,5258.24 7532.88,5258.24 ; 7516.88,5290.24 7535.88,5290.24 ; 7517.88,3238.24 7552.88,3238.24 ; 7517.88,5168.24 7547.88,5168.24 ; 7517.88,5257.24 7533.88,5257.24 ; 7517.88,5291.24 7536.88,5291.24 ; 7518.88,3237.24 7553.88,3237.24 ; 7518.88,5167.24 7547.88,5167.24 ; 7518.88,5256.24 7534.88,5256.24 ; 7518.88,5292.24 7537.88,5292.24 ; 7519.88,3236.24 7554.88,3236.24 ; 7519.88,3343.24 7538.88,3343.24 ; 7519.88,5166.24 7547.88,5166.24 ; 7519.88,5293.24 7538.88,5293.24 ; 7520.88,3235.24 7555.88,3235.24 ; 7520.88,3344.24 7539.88,3344.24 ; 7520.88,5165.24 7547.88,5165.24 ; 7520.88,5255.24 7535.88,5255.24 ; 7520.88,5294.24 7539.88,5294.24 ; 7521.88,3234.24 7556.88,3234.24 ; 7521.88,3345.24 7540.88,3345.24 ; 7521.88,5164.24 7547.88,5164.24 ; 7521.88,5295.24 7540.88,5295.24 ; 7522.88,3233.24 7556.88,3233.24 ; 7522.88,3346.24 7541.88,3346.24 ; 7522.88,5163.24 7548.88,5163.24 ; 7522.88,5254.24 7536.88,5254.24 ; 7522.88,5296.24 7541.88,5296.24 ; 7523.88,3232.24 7556.88,3232.24 ; 7523.88,3347.24 7542.88,3347.24 ; 7523.88,5162.24 7548.88,5162.24 ; 7523.88,5297.24 7545.88,5297.24 ; 7524.88,3231.24 7556.88,3231.24 ; 7524.88,3320.24 7540.88,3320.24 ; 7524.88,3348.24 7543.88,3348.24 ; 7524.88,5161.24 7548.88,5161.24 ; 7524.88,5298.24 7547.88,5298.24 ; 7525.88,3230.24 7556.88,3230.24 ; 7525.88,3319.24 7541.88,3319.24 ; 7525.88,3349.24 7544.88,3349.24 ; 7525.88,5160.24 7548.88,5160.24 ; 7525.88,5253.24 7537.88,5253.24 ; 7525.88,5299.24 7548.88,5299.24 ; 7526.88,3229.24 7557.88,3229.24 ; 7526.88,3318.24 7542.88,3318.24 ; 7526.88,3350.24 7545.88,3350.24 ; 7526.88,5159.24 7548.88,5159.24 ; 7526.88,5300.24 7549.88,5300.24 ; 7527.88,3228.24 7557.88,3228.24 ; 7527.88,3317.24 7543.88,3317.24 ; 7527.88,3351.24 7546.88,3351.24 ; 7527.88,5158.24 7548.88,5158.24 ; 7527.88,5301.24 7550.88,5301.24 ; 7528.88,3227.24 7557.88,3227.24 ; 7528.88,3316.24 7544.88,3316.24 ; 7528.88,3352.24 7547.88,3352.24 ; 7528.88,5157.24 7549.88,5157.24 ; 7528.88,5252.24 7538.88,5252.24 ; 7528.88,5302.24 7551.88,5302.24 ; 7529.88,3226.24 7557.88,3226.24 ; 7529.88,3353.24 7548.88,3353.24 ; 7529.88,5303.24 7551.88,5303.24 ; 7530.88,3225.24 7557.88,3225.24 ; 7530.88,3315.24 7545.88,3315.24 ; 7530.88,3354.24 7549.88,3354.24 ; 7530.88,5304.24 7552.88,5304.24 ; 7531.88,3224.24 7557.88,3224.24 ; 7531.88,3355.24 7550.88,3355.24 ; 7531.88,5251.24 7539.88,5251.24 ; 7531.88,5305.24 7552.88,5305.24 ; 7532.88,3223.24 7558.88,3223.24 ; 7532.88,3314.24 7546.88,3314.24 ; 7532.88,3356.24 7551.88,3356.24 ; 7532.88,5306.24 7552.88,5306.24 ; 7532.88,5307.24 7552.88,5307.24 ; 7532.88,5308.24 7552.88,5308.24 ; 7532.88,5309.24 7552.88,5309.24 ; 7532.88,5310.24 7551.88,5310.24 ; 7533.88,3222.24 7558.88,3222.24 ; 7533.88,3357.24 7555.88,3357.24 ; 7533.88,5156.24 7549.88,5156.24 ; 7533.88,5311.24 7551.88,5311.24 ; 7533.88,5312.24 7550.88,5312.24 ; 7534.88,3221.24 7558.88,3221.24 ; 7534.88,3358.24 7557.88,3358.24 ; 7534.88,5250.24 7540.88,5250.24 ; 7534.88,5313.24 7550.88,5313.24 ; 7535.88,3220.24 7558.88,3220.24 ; 7535.88,3313.24 7547.88,3313.24 ; 7535.88,3359.24 7558.88,3359.24 ; 7535.88,5314.24 7549.88,5314.24 ; 7536.88,3219.24 7558.88,3219.24 ; 7536.88,3360.24 7559.88,3360.24 ; 7536.88,5315.24 7547.88,5315.24 ; 7537.88,3218.24 7558.88,3218.24 ; 7537.88,3361.24 7560.88,3361.24 ; 7537.88,5249.24 7541.88,5249.24 ; 7538.88,3217.24 7559.88,3217.24 ; 7538.88,3312.24 7548.88,3312.24 ; 7538.88,3362.24 7561.88,3362.24 ; 7538.88,5316.24 7545.88,5316.24 ; 7539.88,3363.24 7561.88,3363.24 ; 7539.88,5155.24 7549.88,5155.24 ; 7540.88,3364.24 7562.88,3364.24 ; 7540.88,5248.24 7541.88,5248.24 ; 7541.88,3311.24 7549.88,3311.24 ; 7541.88,3365.24 7562.88,3365.24 ; 7541.88,5137.24 7550.88,5137.24 ; 7542.88,3366.24 7562.88,3366.24 ; 7542.88,3367.24 7562.88,3367.24 ; 7542.88,3368.24 7562.88,3368.24 ; 7542.88,3369.24 7562.88,3369.24 ; 7542.88,3370.24 7561.88,3370.24 ; 7542.88,5330.24 7551.88,5330.24 ; 7543.88,3216.24 7559.88,3216.24 ; 7543.88,3371.24 7561.88,3371.24 ; 7543.88,3372.24 7560.88,3372.24 ; 7544.88,3310.24 7550.88,3310.24 ; 7544.88,3373.24 7560.88,3373.24 ; 7545.88,3374.24 7559.88,3374.24 ; 7545.88,5138.24 7552.88,5138.24 ; 7545.88,5154.24 7549.88,5154.24 ; 7545.88,5329.24 7552.88,5329.24 ; 7546.88,3375.24 7557.88,3375.24 ; 7547.88,3309.24 7551.88,3309.24 ; 7547.88,5139.24 7554.88,5139.24 ; 7548.88,3376.24 7555.88,3376.24 ; 7548.88,5328.24 7554.88,5328.24 ; 7549.88,3215.24 7559.88,3215.24 ; 7549.88,5140.24 7555.88,5140.24 ; 7550.88,3308.24 7551.88,3308.24 ; 7550.88,5327.24 7555.88,5327.24 ; 7551.88,3197.24 7560.88,3197.24 ; 7551.88,5141.24 7556.88,5141.24 ; 7551.88,5326.24 7557.88,5326.24 ; 7552.88,3390.24 7561.88,3390.24 ; 7553.88,5142.24 7557.88,5142.24 ; 7553.88,5325.24 7558.88,5325.24 ; 7554.88,5143.24 7559.88,5143.24 ; 7554.88,5324.24 7559.88,5324.24 ; 7555.88,3198.24 7562.88,3198.24 ; 7555.88,3214.24 7559.88,3214.24 ; 7555.88,3389.24 7562.88,3389.24 ; 7555.88,5144.24 7560.88,5144.24 ; 7555.88,5323.24 7560.88,5323.24 ; 7556.88,5145.24 7560.88,5145.24 ; 7557.88,3199.24 7564.88,3199.24 ; 7557.88,5146.24 7561.88,5146.24 ; 7557.88,5322.24 7561.88,5322.24 ; 7558.88,3388.24 7564.88,3388.24 ; 7558.88,5147.24 7562.88,5147.24 ; 7558.88,5320.24 7562.88,5320.24 ; 7558.88,5321.24 7562.88,5321.24 ; 7559.88,3200.24 7565.88,3200.24 ; 7559.88,5148.24 7563.88,5148.24 ; 7559.88,5319.24 7563.88,5319.24 ; 7560.88,3387.24 7565.88,3387.24 ; 7560.88,5149.24 7564.88,5149.24 ; 7560.88,5318.24 7564.88,5318.24 ; 7561.88,3201.24 7566.88,3201.24 ; 7561.88,3386.24 7567.88,3386.24 ; 7561.88,5150.24 7564.88,5150.24 ; 7561.88,5151.24 7565.88,5151.24 ; 7561.88,5316.24 7565.88,5316.24 ; 7561.88,5317.24 7564.88,5317.24 ; 7562.88,5152.24 7565.88,5152.24 ; 7562.88,5153.24 7566.88,5153.24 ; 7562.88,5315.24 7565.88,5315.24 ; 7563.88,3202.24 7567.88,3202.24 ; 7563.88,3385.24 7568.88,3385.24 ; 7563.88,5154.24 7566.88,5154.24 ; 7563.88,5155.24 7567.88,5155.24 ; 7563.88,5312.24 7567.88,5312.24 ; 7563.88,5313.24 7566.88,5313.24 ; 7563.88,5314.24 7566.88,5314.24 ; 7564.88,3203.24 7569.88,3203.24 ; 7564.88,3384.24 7569.88,3384.24 ; 7564.88,5156.24 7567.88,5156.24 ; 7564.88,5157.24 7567.88,5157.24 ; 7564.88,5310.24 7567.88,5310.24 ; 7564.88,5311.24 7567.88,5311.24 ; 7565.88,3204.24 7570.88,3204.24 ; 7565.88,3383.24 7570.88,3383.24 ; 7565.88,5158.24 7568.88,5158.24 ; 7565.88,5159.24 7568.88,5159.24 ; 7565.88,5160.24 7568.88,5160.24 ; 7565.88,5161.24 7568.88,5161.24 ; 7565.88,5306.24 7569.88,5306.24 ; 7565.88,5307.24 7568.88,5307.24 ; 7565.88,5308.24 7568.88,5308.24 ; 7565.88,5309.24 7568.88,5309.24 ; 7566.88,3205.24 7570.88,3205.24 ; 7566.88,5162.24 7569.88,5162.24 ; 7566.88,5163.24 7569.88,5163.24 ; 7566.88,5164.24 7569.88,5164.24 ; 7566.88,5165.24 7569.88,5165.24 ; 7566.88,5166.24 7569.88,5166.24 ; 7566.88,5167.24 7569.88,5167.24 ; 7566.88,5168.24 7569.88,5168.24 ; 7566.88,5169.24 7569.88,5169.24 ; 7566.88,5170.24 7569.88,5170.24 ; 7566.88,5171.24 7569.88,5171.24 ; 7566.88,5172.24 7569.88,5172.24 ; 7566.88,5173.24 7569.88,5173.24 ; 7566.88,5174.24 7569.88,5174.24 ; 7566.88,5175.24 7569.88,5175.24 ; 7566.88,5176.24 7569.88,5176.24 ; 7566.88,5177.24 7569.88,5177.24 ; 7566.88,5178.24 7569.88,5178.24 ; 7566.88,5179.24 7569.88,5179.24 ; 7566.88,5180.24 7569.88,5180.24 ; 7566.88,5181.24 7569.88,5181.24 ; 7566.88,5182.24 7569.88,5182.24 ; 7566.88,5183.24 7569.88,5183.24 ; 7566.88,5184.24 7569.88,5184.24 ; 7566.88,5185.24 7569.88,5185.24 ; 7566.88,5186.24 7569.88,5186.24 ; 7566.88,5187.24 7569.88,5187.24 ; 7566.88,5188.24 7569.88,5188.24 ; 7566.88,5189.24 7569.88,5189.24 ; 7566.88,5190.24 7569.88,5190.24 ; 7566.88,5191.24 7569.88,5191.24 ; 7566.88,5192.24 7569.88,5192.24 ; 7566.88,5193.24 7569.88,5193.24 ; 7566.88,5194.24 7569.88,5194.24 ; 7566.88,5195.24 7569.88,5195.24 ; 7566.88,5196.24 7569.88,5196.24 ; 7566.88,5197.24 7569.88,5197.24 ; 7566.88,5198.24 7569.88,5198.24 ; 7566.88,5199.24 7569.88,5199.24 ; 7566.88,5200.24 7569.88,5200.24 ; 7566.88,5201.24 7569.88,5201.24 ; 7566.88,5202.24 7569.88,5202.24 ; 7566.88,5203.24 7569.88,5203.24 ; 7566.88,5204.24 7569.88,5204.24 ; 7566.88,5205.24 7569.88,5205.24 ; 7566.88,5206.24 7569.88,5206.24 ; 7566.88,5207.24 7569.88,5207.24 ; 7566.88,5208.24 7569.88,5208.24 ; 7566.88,5209.24 7569.88,5209.24 ; 7566.88,5210.24 7569.88,5210.24 ; 7566.88,5211.24 7569.88,5211.24 ; 7566.88,5212.24 7569.88,5212.24 ; 7566.88,5213.24 7569.88,5213.24 ; 7566.88,5214.24 7569.88,5214.24 ; 7566.88,5215.24 7569.88,5215.24 ; 7566.88,5216.24 7569.88,5216.24 ; 7566.88,5217.24 7569.88,5217.24 ; 7566.88,5218.24 7569.88,5218.24 ; 7566.88,5219.24 7569.88,5219.24 ; 7566.88,5220.24 7569.88,5220.24 ; 7566.88,5221.24 7569.88,5221.24 ; 7566.88,5222.24 7569.88,5222.24 ; 7566.88,5223.24 7569.88,5223.24 ; 7566.88,5224.24 7569.88,5224.24 ; 7566.88,5225.24 7569.88,5225.24 ; 7566.88,5226.24 7569.88,5226.24 ; 7566.88,5227.24 7569.88,5227.24 ; 7566.88,5228.24 7569.88,5228.24 ; 7566.88,5229.24 7569.88,5229.24 ; 7566.88,5230.24 7569.88,5230.24 ; 7566.88,5231.24 7569.88,5231.24 ; 7566.88,5232.24 7569.88,5232.24 ; 7566.88,5233.24 7569.88,5233.24 ; 7566.88,5234.24 7569.88,5234.24 ; 7566.88,5235.24 7569.88,5235.24 ; 7566.88,5236.24 7569.88,5236.24 ; 7566.88,5237.24 7569.88,5237.24 ; 7566.88,5238.24 7569.88,5238.24 ; 7566.88,5239.24 7569.88,5239.24 ; 7566.88,5240.24 7569.88,5240.24 ; 7566.88,5241.24 7569.88,5241.24 ; 7566.88,5242.24 7569.88,5242.24 ; 7566.88,5243.24 7569.88,5243.24 ; 7566.88,5244.24 7569.88,5244.24 ; 7566.88,5245.24 7569.88,5245.24 ; 7566.88,5246.24 7569.88,5246.24 ; 7566.88,5247.24 7569.88,5247.24 ; 7566.88,5248.24 7569.88,5248.24 ; 7566.88,5249.24 7569.88,5249.24 ; 7566.88,5250.24 7569.88,5250.24 ; 7566.88,5251.24 7569.88,5251.24 ; 7566.88,5252.24 7569.88,5252.24 ; 7566.88,5253.24 7569.88,5253.24 ; 7566.88,5254.24 7569.88,5254.24 ; 7566.88,5255.24 7569.88,5255.24 ; 7566.88,5256.24 7569.88,5256.24 ; 7566.88,5257.24 7569.88,5257.24 ; 7566.88,5258.24 7569.88,5258.24 ; 7566.88,5259.24 7569.88,5259.24 ; 7566.88,5260.24 7569.88,5260.24 ; 7566.88,5261.24 7569.88,5261.24 ; 7566.88,5262.24 7569.88,5262.24 ; 7566.88,5263.24 7569.88,5263.24 ; 7566.88,5264.24 7569.88,5264.24 ; 7566.88,5265.24 7569.88,5265.24 ; 7566.88,5266.24 7569.88,5266.24 ; 7566.88,5267.24 7569.88,5267.24 ; 7566.88,5268.24 7569.88,5268.24 ; 7566.88,5269.24 7569.88,5269.24 ; 7566.88,5270.24 7569.88,5270.24 ; 7566.88,5271.24 7569.88,5271.24 ; 7566.88,5272.24 7569.88,5272.24 ; 7566.88,5273.24 7569.88,5273.24 ; 7566.88,5274.24 7569.88,5274.24 ; 7566.88,5275.24 7569.88,5275.24 ; 7566.88,5276.24 7569.88,5276.24 ; 7566.88,5277.24 7569.88,5277.24 ; 7566.88,5278.24 7569.88,5278.24 ; 7566.88,5279.24 7569.88,5279.24 ; 7566.88,5280.24 7569.88,5280.24 ; 7566.88,5281.24 7569.88,5281.24 ; 7566.88,5282.24 7569.88,5282.24 ; 7566.88,5283.24 7569.88,5283.24 ; 7566.88,5284.24 7569.88,5284.24 ; 7566.88,5285.24 7569.88,5285.24 ; 7566.88,5286.24 7569.88,5286.24 ; 7566.88,5287.24 7569.88,5287.24 ; 7566.88,5288.24 7569.88,5288.24 ; 7566.88,5289.24 7569.88,5289.24 ; 7566.88,5290.24 7569.88,5290.24 ; 7566.88,5291.24 7569.88,5291.24 ; 7566.88,5292.24 7569.88,5292.24 ; 7566.88,5293.24 7569.88,5293.24 ; 7566.88,5294.24 7569.88,5294.24 ; 7566.88,5295.24 7569.88,5295.24 ; 7566.88,5296.24 7569.88,5296.24 ; 7566.88,5297.24 7569.88,5297.24 ; 7566.88,5298.24 7569.88,5298.24 ; 7566.88,5299.24 7569.88,5299.24 ; 7566.88,5300.24 7569.88,5300.24 ; 7566.88,5301.24 7569.88,5301.24 ; 7566.88,5302.24 7569.88,5302.24 ; 7566.88,5303.24 7569.88,5303.24 ; 7566.88,5304.24 7569.88,5304.24 ; 7566.88,5305.24 7569.88,5305.24 ; 7567.88,3206.24 7571.88,3206.24 ; 7567.88,3382.24 7571.88,3382.24 ; 7568.88,3207.24 7572.88,3207.24 ; 7568.88,3380.24 7572.88,3380.24 ; 7568.88,3381.24 7572.88,3381.24 ; 7569.88,3208.24 7573.88,3208.24 ; 7569.88,3379.24 7573.88,3379.24 ; 7570.88,3209.24 7574.88,3209.24 ; 7570.88,3378.24 7574.88,3378.24 ; 7571.88,3210.24 7574.88,3210.24 ; 7571.88,3211.24 7575.88,3211.24 ; 7571.88,3376.24 7575.88,3376.24 ; 7571.88,3377.24 7574.88,3377.24 ; 7572.88,3212.24 7575.88,3212.24 ; 7572.88,3213.24 7576.88,3213.24 ; 7572.88,3375.24 7575.88,3375.24 ; 7573.88,3214.24 7576.88,3214.24 ; 7573.88,3215.24 7577.88,3215.24 ; 7573.88,3372.24 7577.88,3372.24 ; 7573.88,3373.24 7576.88,3373.24 ; 7573.88,3374.24 7576.88,3374.24 ; 7574.88,3216.24 7577.88,3216.24 ; 7574.88,3217.24 7577.88,3217.24 ; 7574.88,3370.24 7577.88,3370.24 ; 7574.88,3371.24 7577.88,3371.24 ; 7575.88,3218.24 7578.88,3218.24 ; 7575.88,3219.24 7578.88,3219.24 ; 7575.88,3220.24 7578.88,3220.24 ; 7575.88,3221.24 7578.88,3221.24 ; 7575.88,3366.24 7579.88,3366.24 ; 7575.88,3367.24 7578.88,3367.24 ; 7575.88,3368.24 7578.88,3368.24 ; 7575.88,3369.24 7578.88,3369.24 ; 7576.88,3222.24 7579.88,3222.24 ; 7576.88,3223.24 7579.88,3223.24 ; 7576.88,3224.24 7579.88,3224.24 ; 7576.88,3225.24 7579.88,3225.24 ; 7576.88,3226.24 7579.88,3226.24 ; 7576.88,3227.24 7579.88,3227.24 ; 7576.88,3228.24 7579.88,3228.24 ; 7576.88,3229.24 7579.88,3229.24 ; 7576.88,3230.24 7579.88,3230.24 ; 7576.88,3231.24 7579.88,3231.24 ; 7576.88,3232.24 7579.88,3232.24 ; 7576.88,3233.24 7579.88,3233.24 ; 7576.88,3234.24 7579.88,3234.24 ; 7576.88,3235.24 7579.88,3235.24 ; 7576.88,3236.24 7579.88,3236.24 ; 7576.88,3237.24 7579.88,3237.24 ; 7576.88,3238.24 7579.88,3238.24 ; 7576.88,3239.24 7579.88,3239.24 ; 7576.88,3240.24 7579.88,3240.24 ; 7576.88,3241.24 7579.88,3241.24 ; 7576.88,3242.24 7579.88,3242.24 ; 7576.88,3243.24 7579.88,3243.24 ; 7576.88,3244.24 7579.88,3244.24 ; 7576.88,3245.24 7579.88,3245.24 ; 7576.88,3246.24 7579.88,3246.24 ; 7576.88,3247.24 7579.88,3247.24 ; 7576.88,3248.24 7579.88,3248.24 ; 7576.88,3249.24 7579.88,3249.24 ; 7576.88,3250.24 7579.88,3250.24 ; 7576.88,3251.24 7579.88,3251.24 ; 7576.88,3252.24 7579.88,3252.24 ; 7576.88,3253.24 7579.88,3253.24 ; 7576.88,3254.24 7579.88,3254.24 ; 7576.88,3255.24 7579.88,3255.24 ; 7576.88,3256.24 7579.88,3256.24 ; 7576.88,3257.24 7579.88,3257.24 ; 7576.88,3258.24 7579.88,3258.24 ; 7576.88,3259.24 7579.88,3259.24 ; 7576.88,3260.24 7579.88,3260.24